# Altium PCB HMI.PcbDoc
Units mil, origin at the board's own origin, x right, y up, seen from the top; angles counter-clockwise.
Board outline 1978.54 x 1980.45 mil, 2 copper layers (Top Layer, Bottom Layer); 13 components, 0 nets, 41 pads, 0 vias.
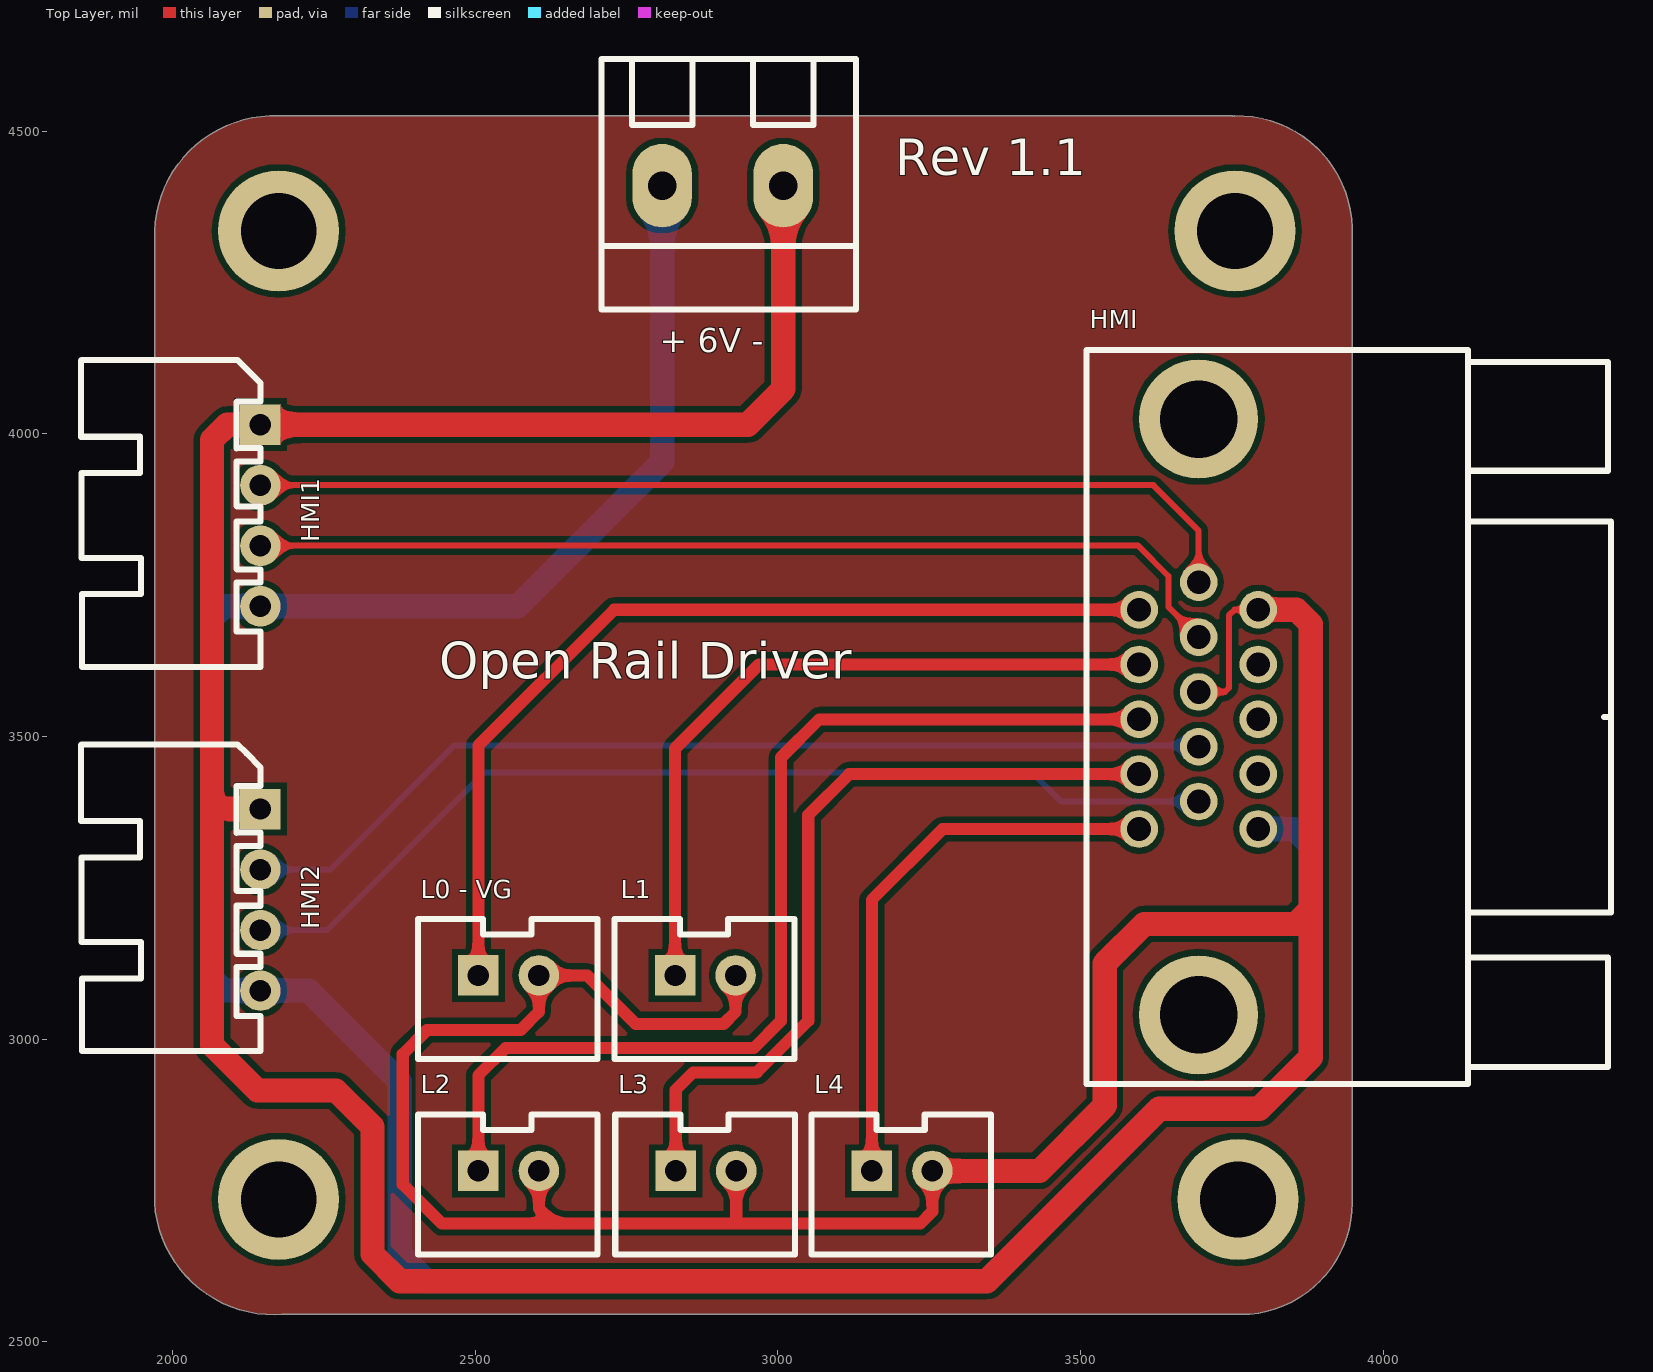
[diagram p0: Top Layer view]
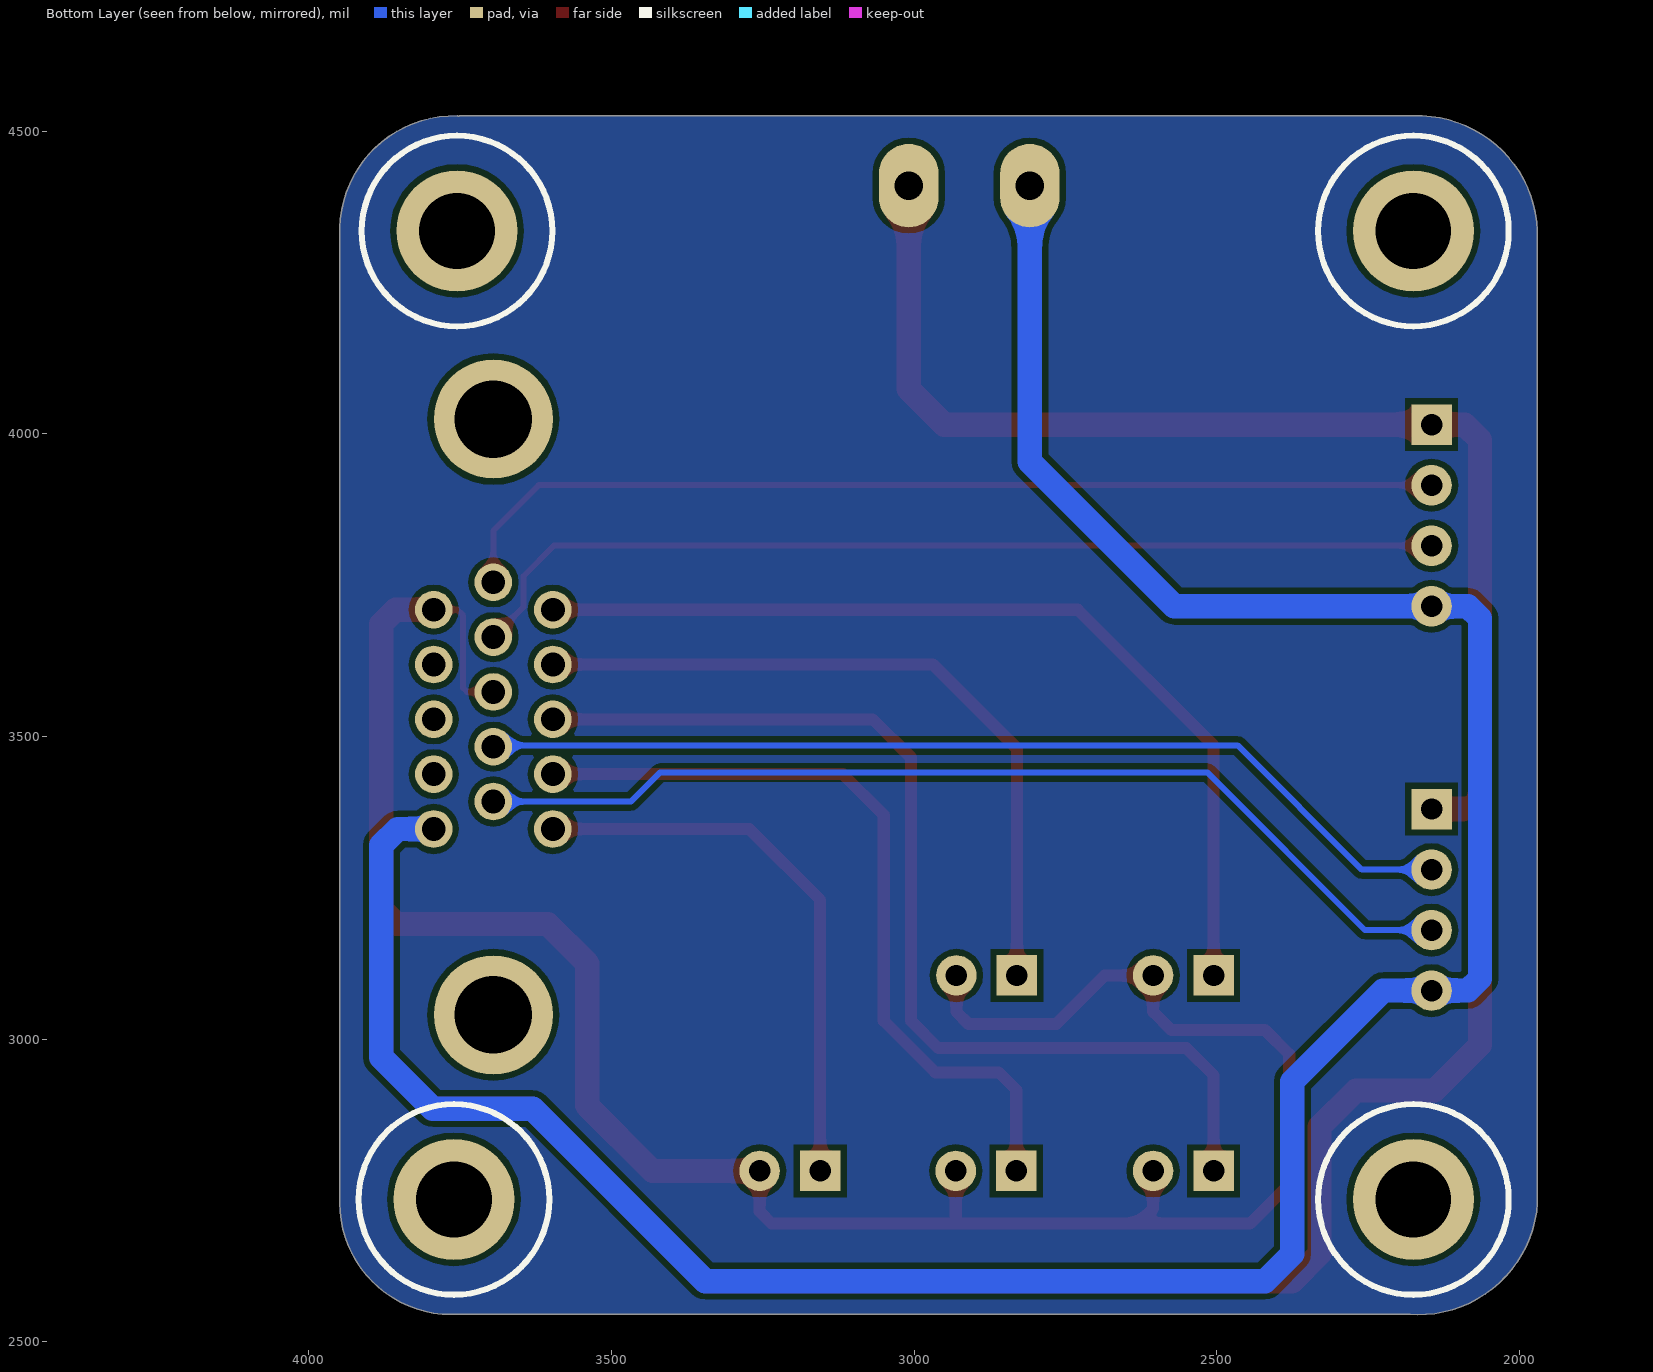
[diagram p1: Bottom Layer view, seen from below]

## Layer stack, top to bottom
Top Solder: solder mask 0.4, Solder Resist, Dk 3.5
Top Layer: signal copper 1.4
Dielectric 1: dielectric 12.6, FR-4, Dk 4.8
Bottom Layer: signal copper 1.4
Bottom Solder: solder mask 0.4, Solder Resist, Dk 3.5

## Board outline
1970,2729.68 cw(c1975,2730) 1969.98,2730 1969.98,4335 cw(c1975,4335) 1969.99,4335.2 cw(c2167.5,4327.5) 2175.1,4525.02 3750,4525.02 cw(c3750,4520) 3752.5,4524.35 cw(c3755,4520) 3754.88,4525.01 cw(c3759.25,4335.75) 3948.52,4340.12 cw(c3943.5,4340) 3948.52,4340 cw(c3943.5,4340) 3948.52,4339.94 3948.52,2730.05 cw(c3943.5,2730) 3948.52,2730.02 cw(c3764.25,2729.25) 3948.52,2729.25 cw(c3764.25,2729.25) 3765.02,2544.99 cw(c3765,2550) 3765,2544.99 2180.16,2544.99 cw(c2167.5,2742.5) 2154.68,2545 cw(c2167.5,2742.5)

## Design rules (kind name [scope] priority, off if disabled: settings)
Clearance [All] p1: gap=10 ignorepadtopadclearanceinfootprint=FALSE except(0: Arc-Hole Track-Hole SMDPad-Hole THPad-Hole Via-Hole Fill-Hole Poly-Hole Region-Hole Text-Hole)
DiffPairsRouting [All] p1: maxlimit=10 minlimit=10 mostfreqgap=10 toplayer_minwidth=15 toplayer_maxwidth=15 toplayer_prefwidth=15 bottomlayer_minwidth=15 bottomlayer_maxwidth=15 bottomlayer_prefwidth=15 substack1={859E2B49-9BCD-467D-9D83-F6E93DB37CB2} toplayer_{859e2b49-9bcd-467d-9d83-f6e93db37cb2}_minwidth=15 toplayer_{859e2b49-9bcd-467d-9d83-f6e93db37cb2}_maxwidth=15 toplayer_{859e2b49-9bcd-467d-9d83-f6e93db37cb2}_prefwidth=15 bottomlayer_{859e2b49-9bcd-467d-9d83-f6e93db37cb2}_minwidth=15 bottomlayer_{859e2b49-9bcd-467d-9d83-f6e93db37cb2}_maxwidth=15 bottomlayer_{859e2b49-9bcd-467d-9d83-f6e93db37cb2}_prefwidth=15 maxuncoupledlength=500
PolygonConnect [All] p1: connectstyle=Relief reliefconductorwidth=10 reliefentries=4 polygonreliefangle="90 Angle" airgapwidth=10
RoutingVias [All] p1: holewidth=28 width=50 viastyle="Through Hole" minholewidth=28 minwidth=50 maxholewidth=28 maxwidth=50
SolderMaskExpansion [All] p1: expansion=4 istentingtop=FALSE
Width [All] p1: maxlimit=100 minlimit=10 preferedwidth=10 substack1={859E2B49-9BCD-467D-9D83-F6E93DB37CB2} minimp=50.000000 maximp=50.000000 favimp=50.000000
29 further rules are at their usual default settings.

## Components (designator, comment, footprint, x,y, rotation, side; value= is the part's Value field where it differs from the comment)
"+ 6V -" "Comment" KF128-5.08-2P 2908.68,4410 r180 top
HMI "Comment" VGA15B 3596.58,3528.19 r270 top
HMI1 "Comment" XH2.54-WI-4P 2145,3865 r270 top
HMI2 "Comment" XH2.54-WI-4P 2145,3230 r270 top
"L0 - VG" "Comment" XH2.54-LI-2P 2555,3105 r0 top
L1 "Comment" XH2.54-LI-2P 2880,3105 r0 top
L2 "Comment" XH2.54-LI-2P 2555,2782.07 r0 top
L3 "Comment" XH2.54-LI-2P 2881.03,2782.07 r0 top
L4 "Comment" XH2.54-LI-2P 3205,2782.07 r0 top
? "Comment" M3x8+6_L 3760,2735 r270 bottom
? "Comment" M3x8+6_L 2175,2735 r270 bottom
? "Comment" M3x8+6_L 3755,4335 r270 bottom
? "Comment" M3x8+6_L 2175,4335 r270 bottom

## Footprints (in the part's own frame and the unit in brackets; to place one, negate y for a bottom-side part, rotate by r counter-clockwise, add the part's x,y. Pads: shape width x height; smd on the part's side, far side on the other; paste and mask are expansions set on the pad)
KF128-5.08-2P [mm] "螺钉式接线端子，脚距5.08mm"
  oval 2.5x3.5 hole 1.2: 1(-2.54,0) 2(2.54,0)
  silkscreen extent -5.59,-5.31 5.08,5.21, body extent -5.58,-5.3 5.08,5.2, height 14.15
M3x8+6_L [mil] "M3铜柱，长：8mm，螺纹长：6mm"
  round 200 hole 125: 1(0,0)
  silkscreen extent -157,-157 157,157, body extent -106,-93 106,93, height 317
VGA15B [mm] "15针通讯接口"
  round 1.58 hole 1: 1(-4.6,0) 2(-2.3,0) 3(0,0) 4(2.3,0) 5(4.6,0) 6(-5.75,2.5) 7(-3.45,2.5) 8(-1.15,2.5) 9(1.15,2.5) 10(3.45,2.5) 11(-4.6,5) 12(-2.3,5) 13(0,5) 14(2.3,5) 15(4.6,5)
  round 5 hole 3.25: 16(-12.6,2.5) 17(12.4,2.5)
  silkscreen extent -15.5,-2.2 15.3,19.8, body extent -15.66,-0.87 15.15,20.23, height 12.77
XH2.54-LI-2P [mm] "接插件，2P"
  rect 1.7x1.7 hole 0.9: 1(-1.27,0)
  round 1.7 hole 0.9: 2(1.27,0)
  silkscreen extent -3.81,-3.51 3.74,2.37, body extent -3.77,-3.3 3.77,2.4, height 7.05
XH2.54-WI-4P [mm] "接插件，4P"
  rect 1.7x1.7 hole 0.9: 1(-3.81,0)
  round 1.7 hole 0.9: 2(-1.27,0) 3(1.27,0) 4(3.81,0)
  silkscreen extent -6.53,-7.53 6.35,0, body extent -6.31,-7.35 6.31,0.35, height 5.73

## Nets (pads, with @x,y where several pads share a name; then routed paths per layer and width w, separated by ;. In a path a pad name is that pad's centre, name@x,y a point inside that pad or via, vN(x,y) a via of type N, cw(c..) or ccw(c..) an arc to the next point about the centre after c; other vN are vias at no path point)
pads on no net: "+ 6V -.1" "+ 6V -.2" "L0 - VG.1" "L0 - VG.2" ?.1 HMI1.1 HMI1.2 HMI1.3 HMI1.4 HMI2.1 HMI2.2 HMI2.3 HMI2.4 HMI.1 HMI.2 HMI.3 HMI.4 HMI.5 HMI.6 HMI.7 HMI.8 HMI.9 HMI.10 HMI.11 HMI.12 HMI.13 HMI.14 HMI.15 HMI.16 HMI.17 L1.1 L1.2 L2.1 L2.2 L3.1 L3.2 L4.1 L4.2
copper on no net: | length 26831.4
  Top Layer w10: 2145,3815 3595,3815 3645,3765 3645,3714.02 3695,3664.01 ; 2145,3915 3620,3915 3695,3840 3695,3754.57 ; 3695,3573.46 3738.46,3573.46 3745,3580 3745,3700 3754.29,3709.29 3793.43,3709.29
  Top Layer w20: 2065,3405 2090,3380 ; 2505,2782.07 2505,2940 2550,2985 2960,2985 3005,3030 3005,3465 3068.19,3528.19 3596.58,3528.19 ; 2505,3105 2505,3485 2729.29,3709.29 3596.58,3709.29 ; 2605,2782.07 2605,2720 2630,2695 ; 2830,3105 2830,3480 2968.74,3618.74 3596.58,3618.74 ; 2831.03,2782.07 2831.03,2916.03 2860,2945 2965,2945 3050,3030 3050,3370 3117.64,3437.64 3596.58,3437.64 ; 2930,3105 2930,3045 2910,3025 2765,3025 2685,3105 2605,3105 2605,3045 2575,3015 2420,3015 2380,2975 2380,2760 2445,2695 2630,2695 ; 2931.03,2696.47 2931.03,2782.07 ; 3155,2782.07 3155,3230 3272.09,3347.09 3596.58,3347.09 ; 3255,2782.07 3255,2715 3235,2695 2630,2695
  Top Layer w40: 2090,3380 2145,3380 ; 3008.68,4410 3008.68,4073.68 2950,4015 2145,4015 2090,4015 2065,3990 2065,3405 2065,2990 2140,2915 2270,2915 2330,2855 2330,2645 2375,2600 3345,2600 3630,2885 3795,2885 3880,2970 3880,3215 ; 3255,2782.07 3432.07,2782.07 3540,2890 3540,3125 3605,3190 3855,3190 3880,3215 ; 3793.43,3709.29 3856.57,3709.29 3880,3685.86 3880,3215
  Bottom Layer w10: 2145,3180 2255,3180 2515,3440 3420,3440 3467.64,3392.36 3695,3392.36 ; 2145,3280 2260,3280 2465.24,3485.24 3692.67,3485.24 3695,3482.91
  Bottom Layer w40: 2808.68,4410 2808.68,3953.68 2570,3715 2145,3715 2085,3715 2065,3695 2065,3100 2085,3080 2145,3080 2225,3080 2375,2930 2375,2645 2420,2600 3345,2600 3630,2885 3795,2885 3880,2970 3880,3320 3852.91,3347.09 3793.43,3347.09

## Polygon pours and split planes (outlines as drawn)
no net on Top Layer "NONET_L01_P000" (solid, pour order 0): 1970,2729.68 cw(c1975,2730) 1969.98,2730 1969.98,4335 cw(c1975,4335) 1969.99,4335.2 cw(c2167.5,4327.5) 2175.1,4525.02 3750,4525.02 cw(c3750,4520) 3752.5,4524.35 cw(c3755,4520) 3754.88,4525.01 cw(c3759.25,4335.75) 3948.52,4340.12 cw(c3943.5,4340) 3948.52,4340 cw(c3943.5,4340) 3948.52,4339.94 3948.52,2730.05 cw(c3943.5,2730) 3948.52,2730.02 cw(c3764.25,2729.25) 3948.52,2729.25 cw(c3764.25,2729.25) 3765.02,2544.99 cw(c3765,2550) 3765,2544.99 2180.16,2544.99 cw(c2167.5,2742.5) 2154.68,2545 cw(c2167.5,2742.5)
no net on Bottom Layer "NONET_L02_P001" (solid, pour order 1): 1970,2729.68 cw(c1975,2730) 1969.98,2730 1969.98,4335 cw(c1975,4335) 1969.99,4335.2 cw(c2167.5,4327.5) 2175.1,4525.02 3750,4525.02 cw(c3750,4520) 3752.5,4524.35 cw(c3755,4520) 3754.88,4525.01 cw(c3759.25,4335.75) 3948.52,4340.12 cw(c3943.5,4340) 3948.52,4340 cw(c3943.5,4340) 3948.52,4339.94 3948.52,2730.05 cw(c3943.5,2730) 3948.52,2730.02 cw(c3764.25,2729.25) 3948.52,2729.25 cw(c3764.25,2729.25) 3765.02,2544.99 cw(c3765,2550) 3765,2544.99 2180.16,2544.99 cw(c2167.5,2742.5) 2154.68,2545 cw(c2167.5,2742.5)

## Silkscreen, mask and mechanical layers (free items; w line width, h text height)
Top Overlay:
  text "Rev 1.1" at 3193.97,4427.33 h60
  text "Open Rail Driver" at 2440,3594.99 h60
Mechanical 1:
  lines w10: 2155,2550 3765,2550 ccw(c3764.25,2729.25) 3943.5,2730 3943.5,4340 ccw(c3759.25,4335.75) 3755,4520 ; 2160,4520 3750,4520 ; 2175,4520 ccw(c2167.5,4327.5) 1975,4335 1975,2730 ccw(c2167.5,2742.5) 2180,2550